# EAGLE board Siren_Vero_ckt (EAGLE 7.7.0)
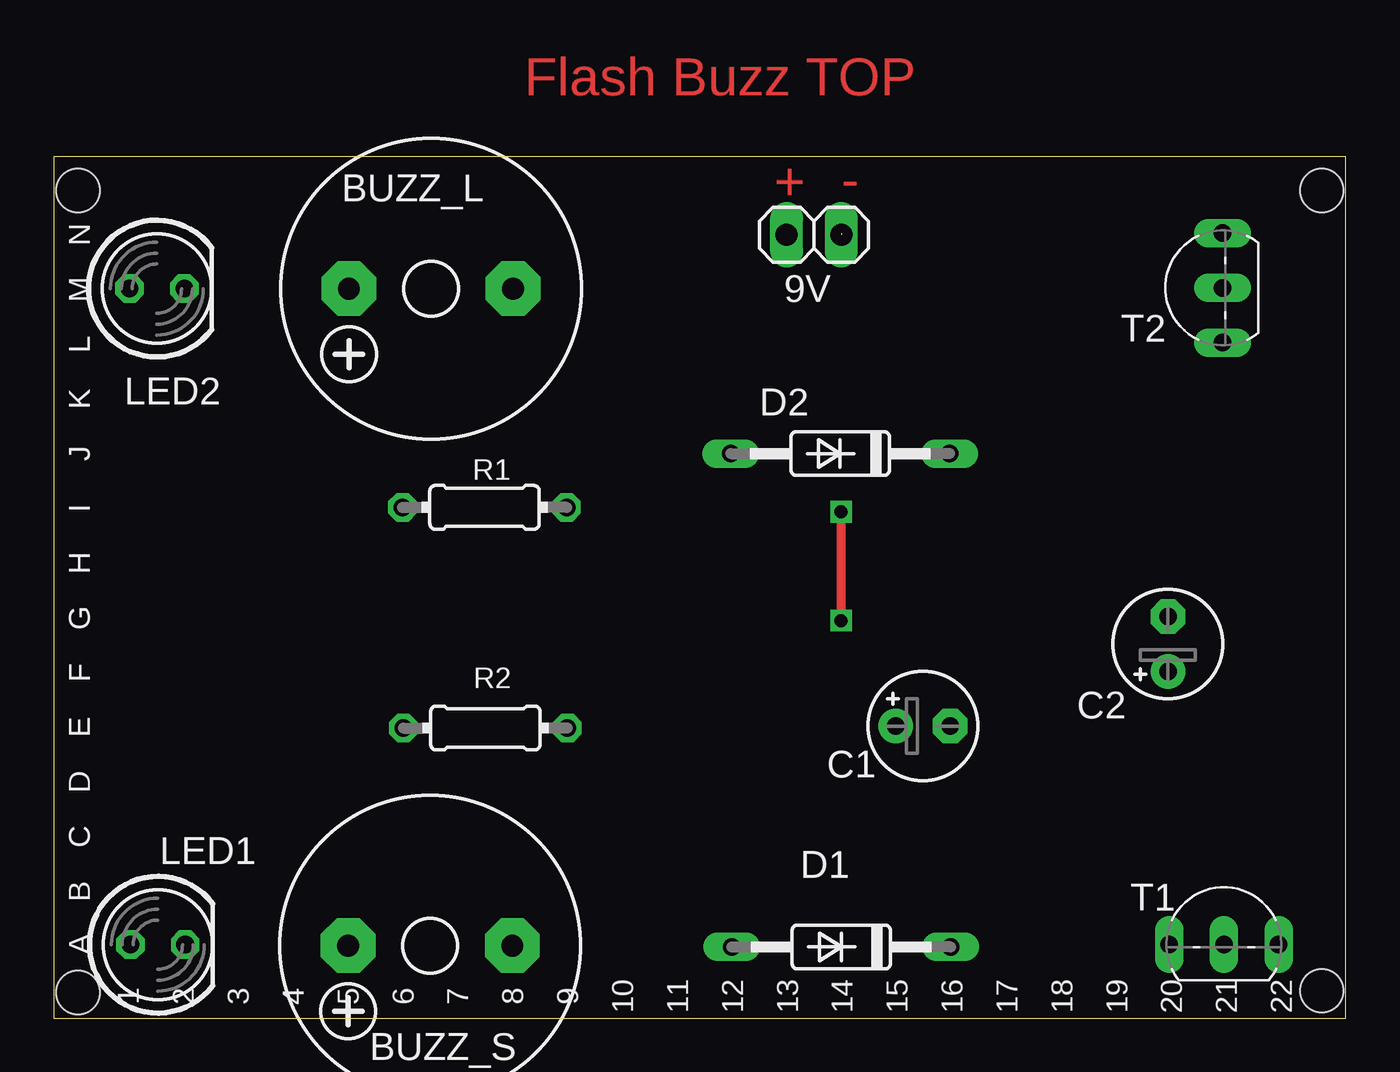
[diagram p0: board, top side]
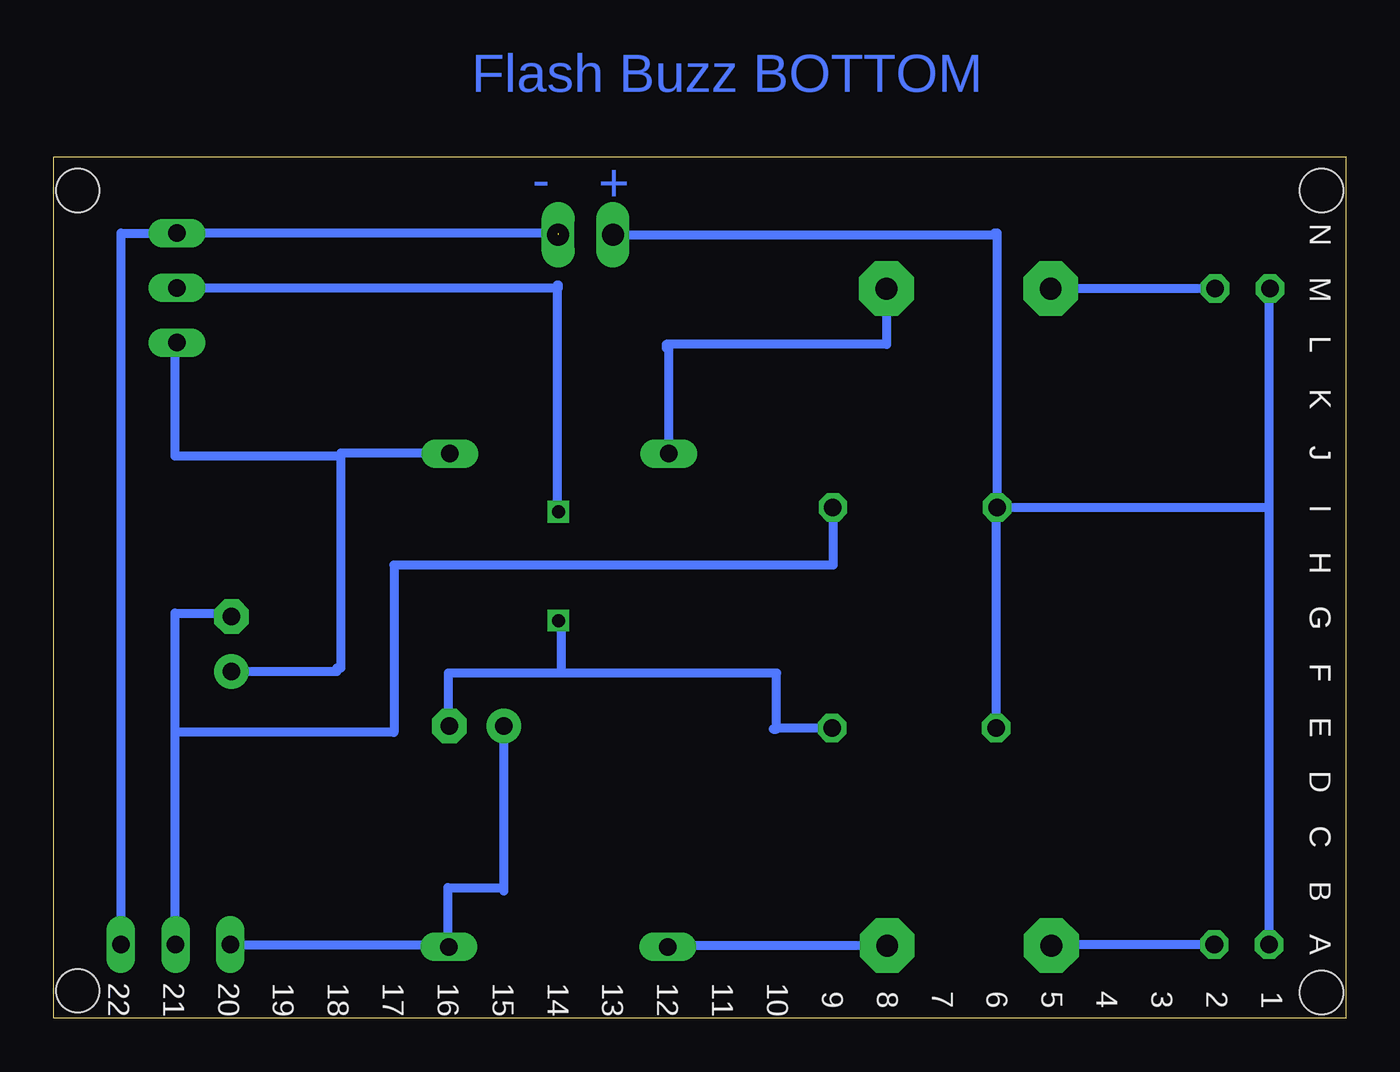
[diagram p1: board, bottom side, seen from below]

Size 60 x 40 mm. Coordinates in mm from the lower left corner, seen from the top.
Outline: 0,0 60,0 60,40 0,40 0,0
Copper layers (1*16): Top 0.035mm / dielectric 1.5mm / Bottom 0.035mm
Design rules "default": minimum track width 10mil, minimum drill 24mil, track to track 8mil, track to pad 8mil, pad to pad 8mil, via to via 8mil, smd to smd 8mil, copper to edge 40mil, drill to drill 8mil, minimum pad ring 10mil, minimum via ring 8mil, stop-mask expansion 4mil, vias tented up to drill 0mil, thermal gap 10mil
Holes 2 mm at 58.89,1.27 58.89,38.43 1.12,1.19 1.12,38.43

## Footprints (pad centres in the part's own frame; a part is rotated, then mirrored left to right if it is on the bottom)
1X02 = drill 1.016 long: 1 -1.27,0; 2 1.27,0
F/CM12P = drill 1.016 pad 2.54 octagon: + 3.81,0; - -3.81,0
E2,5-5 = drill 0.813 pad 1.6: + -1.27,0 | drill 0.813 pad 1.6 octagon: - 1.27,0
DO35-10 = drill 0.813 long: A 5.08,0; C -5.08,0
LED5MM = drill 0.813 octagon: A -1.27,0; K 1.27,0
0204/7 = drill 0.813 octagon: 1 -3.81,0; 2 3.81,0
TO92-CBE = drill 0.813 long: B 0,0; C -2.54,0; E 2.54,0

## Placement (x,y rotation side)
1  [1X14]  3.54,19.86 90 top
2  [1X14]  6.08,19.86 90 top
4  [1X14]  11.16,19.86 90 top
9V  [1X02]  35.3,36.36 0 top
BUZZ_L  F/CM12P  [F/CM12P]  17.52,33.87 180 top
BUZZ_S  F/CM12P  [F/CM12P]  17.48,3.36 180 top
C1  100uf  [E2,5-5]  40.36,13.56 0 top
C2  100uf  [E2,5-5]  51.74,17.36 90 top
D1  1N4148  [DO35-10]  36.57,3.3 180 top
D2  1N4148  [DO35-10]  36.52,26.21 180 top
JP3  [1X14]  8.62,19.86 90 top
JP5  [1X14]  13.7,19.86 90 top
JP6  [1X14]  16.24,19.86 90 top
JP7  [1X14]  18.78,19.86 90 top
JP8  [1X14]  21.32,19.86 90 top
JP9  [1X14]  23.86,19.86 90 top
JP10  [1X14]  26.4,19.86 90 top
JP11  [1X14]  28.94,19.86 90 top
JP12  [1X14]  31.48,19.86 90 top
JP13  [1X14]  34.02,19.86 90 top
JP14  [1X14]  36.56,19.86 90 top
JP15  [1X14]  39.1,19.86 90 top
JP16  [1X14]  41.64,19.86 90 top
JP17  [1X14]  44.18,19.86 90 top
JP18  [1X14]  46.72,19.86 90 top
JP19  [1X14]  49.26,19.86 90 top
JP20  [1X14]  51.8,19.86 90 top
JP21  [1X14]  54.34,19.86 90 top
JP22  [1X14]  56.88,19.86 90 top
LED1  RED  [LED5MM]  4.83,3.41 0 top
LED2  BLUE  [LED5MM]  4.79,33.87 0 top
R1  10k  [0204/7]  20,23.71 0 top
R2  10k  [0204/7]  20.05,13.47 0 top
T1  BC548B  [TO92-CBE]  54.34,3.41 0 top
T2  BC548B  [TO92-CBE]  54.29,33.9 90 top

## Library data of the parts
1 2 4 JP3 JP5-JP22 = pinhead_1x14_no_frame MOD
9V = pinhead
BUZZ_L BUZZ_S = buzzer; OC_FARNELL: unknown; OC_NEWARK: unknown
C1 C2 R1 R2 = resistor
D1 D2 = diode
LED1 LED2 = led
T1 T2 = transistor

## Nets
N$1: BUZZ_S.+ LED1.K
N$2: BUZZ_S.- D1.A
N$3: C1.+ D1.C T1.C
N$4: 9V.2 T1.E T2.E
N$5: BUZZ_L.+ LED2.K
N$6: BUZZ_L.- D2.A
N$7: C2.+ D2.C T2.C
N$9: C2.- R1.2 T1.B
N$10: C1.- R2.2 T2.B
N$11: 9V.1 LED1.A LED2.A R1.1 R2.1

## Tracks (layer width: path | path; a pad name or v marks a point on that pad's centre or on a via)
N$1
  Bottom 0.406: LED1.K 13.67,3.41 BUZZ_S.+
N$2
  Bottom 0.406: BUZZ_S.- 31.49,3.36 D1.A
N$3
  Bottom 0.406: T1.C 41.7,3.41 | D1.C 41.65,3.41 41.7,3.41 | 41.7,3.41 41.7,6.06 39.11,6.06 39.11,5.9 39.09,5.9 C1.+
N$4  (1 unrouted)
  Bottom 0.406: T1.E 56.88,36.44 T2.E 36.57,36.44
N$5
  Bottom 0.406: LED2.K BUZZ_L.+ | BUZZ_L.+
N$6
  Bottom 0.406: BUZZ_L.- 21.32,31.27 31.57,31.27 31.57,31.12 31.44,31.12 D2.A
N$7
  Bottom 0.406: C2.+ 46.85,16.09 46.85,16.25 46.67,16.25 46.67,26.04 46.67,26.09 | 46.67,26.09 46.67,26.24 41.6,26.24 D2.C | T2.C 54.38,31.36 54.38,26.09 46.67,26.09
N$9
  Bottom 0.406: T1.B 54.37,3.41 54.37,13.19 54.37,13.26 | 54.37,13.26 54.37,18.8 51.74,18.8 C2.- | R1.2 23.81,21.03 44.21,21.03 44.21,13.26 54.37,13.26
N$10  (via drill 0.6)
  Top 0.406: v36.57,23.51 v36.57,18.45
  Bottom 0.406: 26.59,13.41 26.43,13.41 26.43,13.47 | 26.43,13.47 26.43,16.03 36.44,16.03 | T2.B 36.56,33.9 36.56,34.03 36.62,34.03 36.62,23.51 v36.57,23.51 | R2.2 26.43,13.47 | C1.- 41.67,13.55 41.67,16.03 36.44,16.03 | v36.57,18.45 36.44,18.45 36.44,16.03
N$11
  Bottom 0.406: LED2.A 3.56,33.87 3.56,23.71 | 3.56,23.71 LED1.A | R1.1 16.23,23.71 R2.1 | R1.1 3.56,23.71 | 9V.1 16.3,36.37 16.3,36.45 16.19,36.45 R1.1

## Text on the board
Top: Flash Buzz TOP | + | -
Bottom: Flash Buzz BOTTOM | + | -
tPlace: N | M | L | K | J | I | H | G | F | E | D | C | B | A | 1 / 2 / 3 / 4 / 5 / 6 / 7 / 8 / 9 / 10 / 11 / 12 / 13 / 14 / 15 / 16 / 17 / 18 / 19 / 20 / 21 / 22
bPlace: N | M | L | K | J | I | H | G | F | E | D | C | B | A | 1 / 2 / 3 / 4 / 5 / 6 / 7 / 8 / 9 / 10 / 11 / 12 / 13 / 14 / 15 / 16 / 17 / 18 / 19 / 20 / 21 / 22